# Altium PCB Grabber_DIOT.PCBDOC (part 1 of 7)
Units mm, origin at the board's own origin, x right, y up, seen from the top; angles counter-clockwise.
Board outline 222.9 x 100 mm, 4 copper layers (L1, P2, P3, L4), stack 1.6 mm thick; 235 components, 180 nets, 1032 pads, 664 vias.
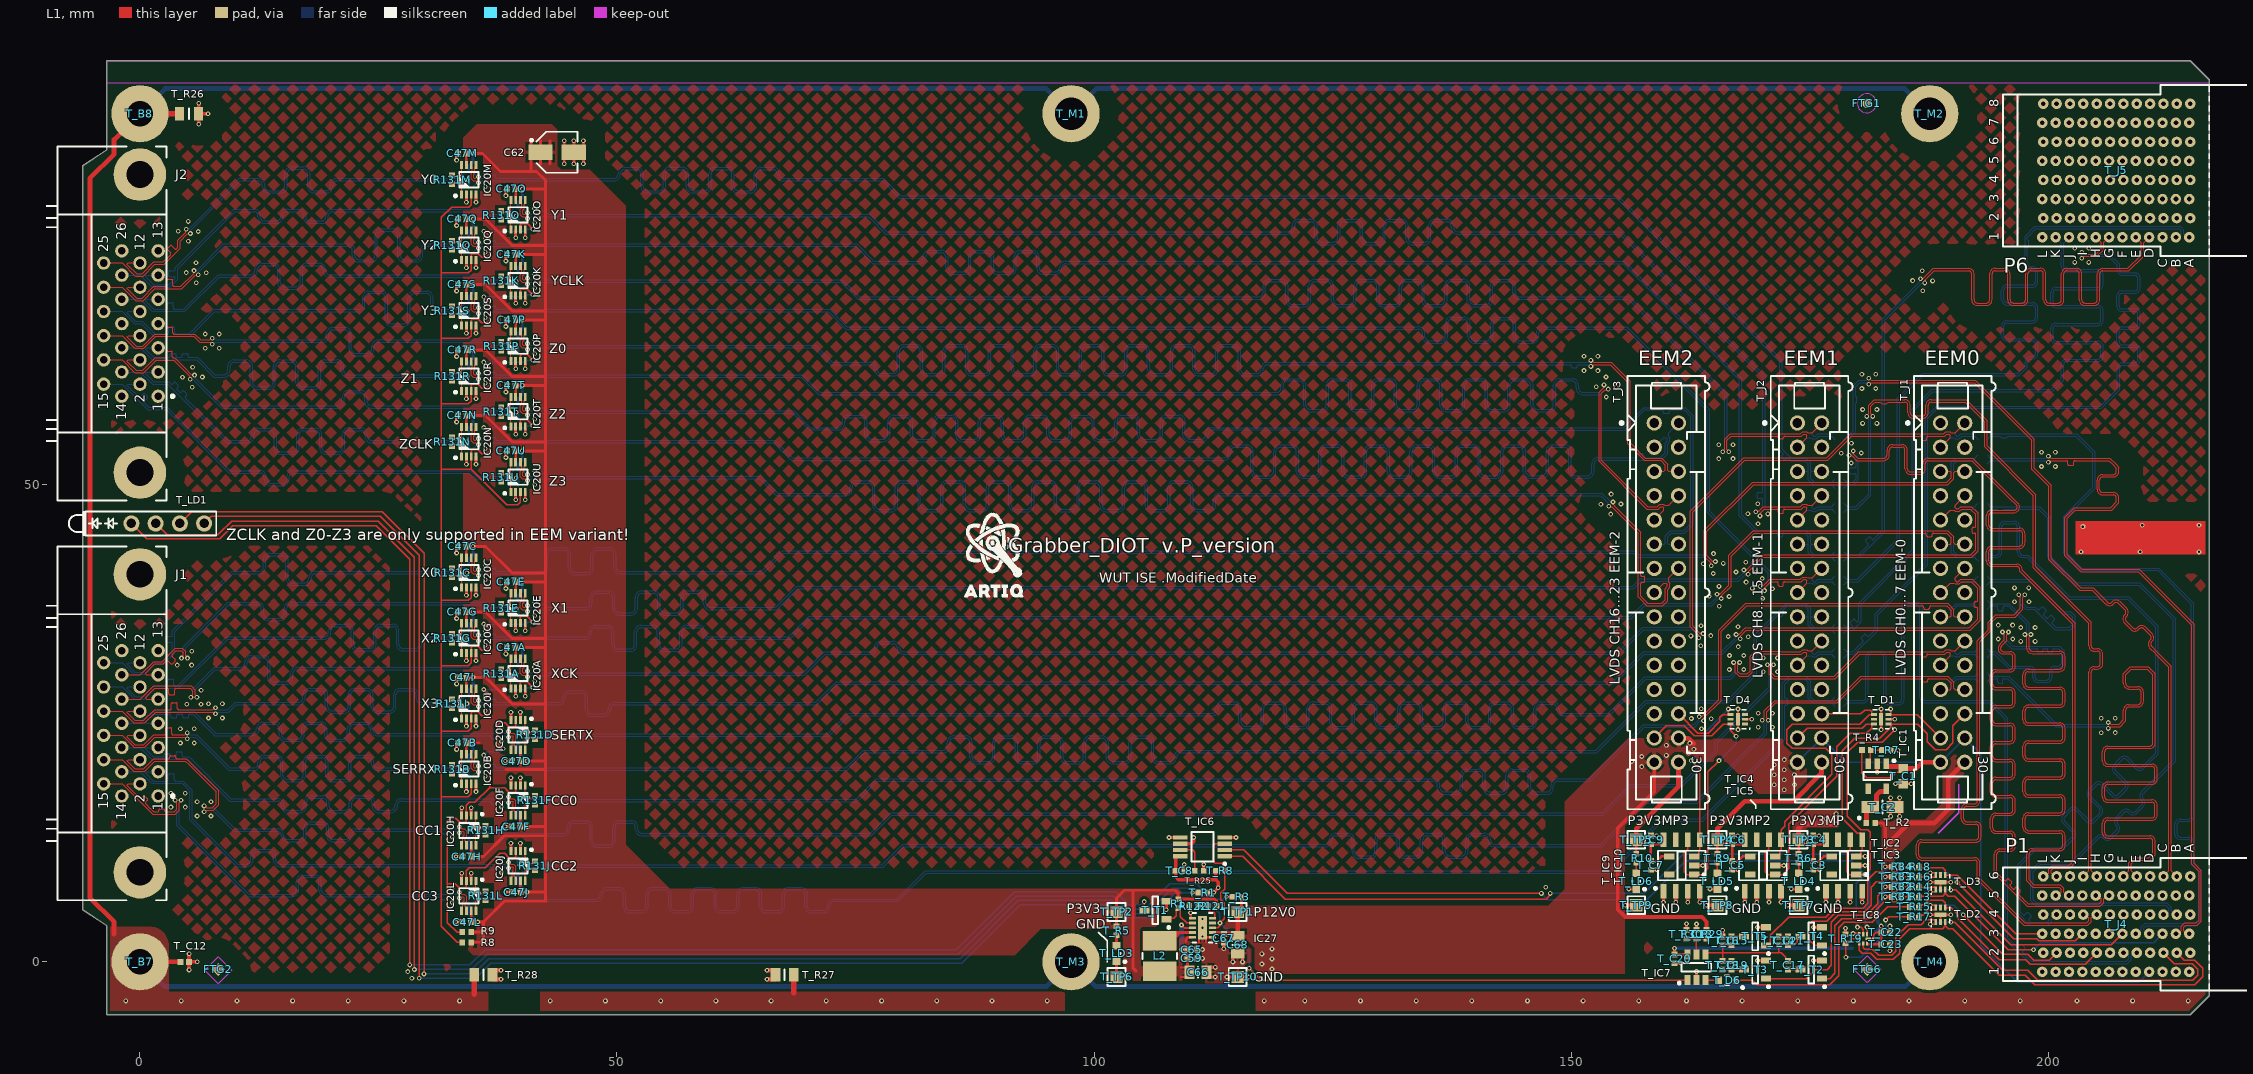
[diagram p0: L1 view]
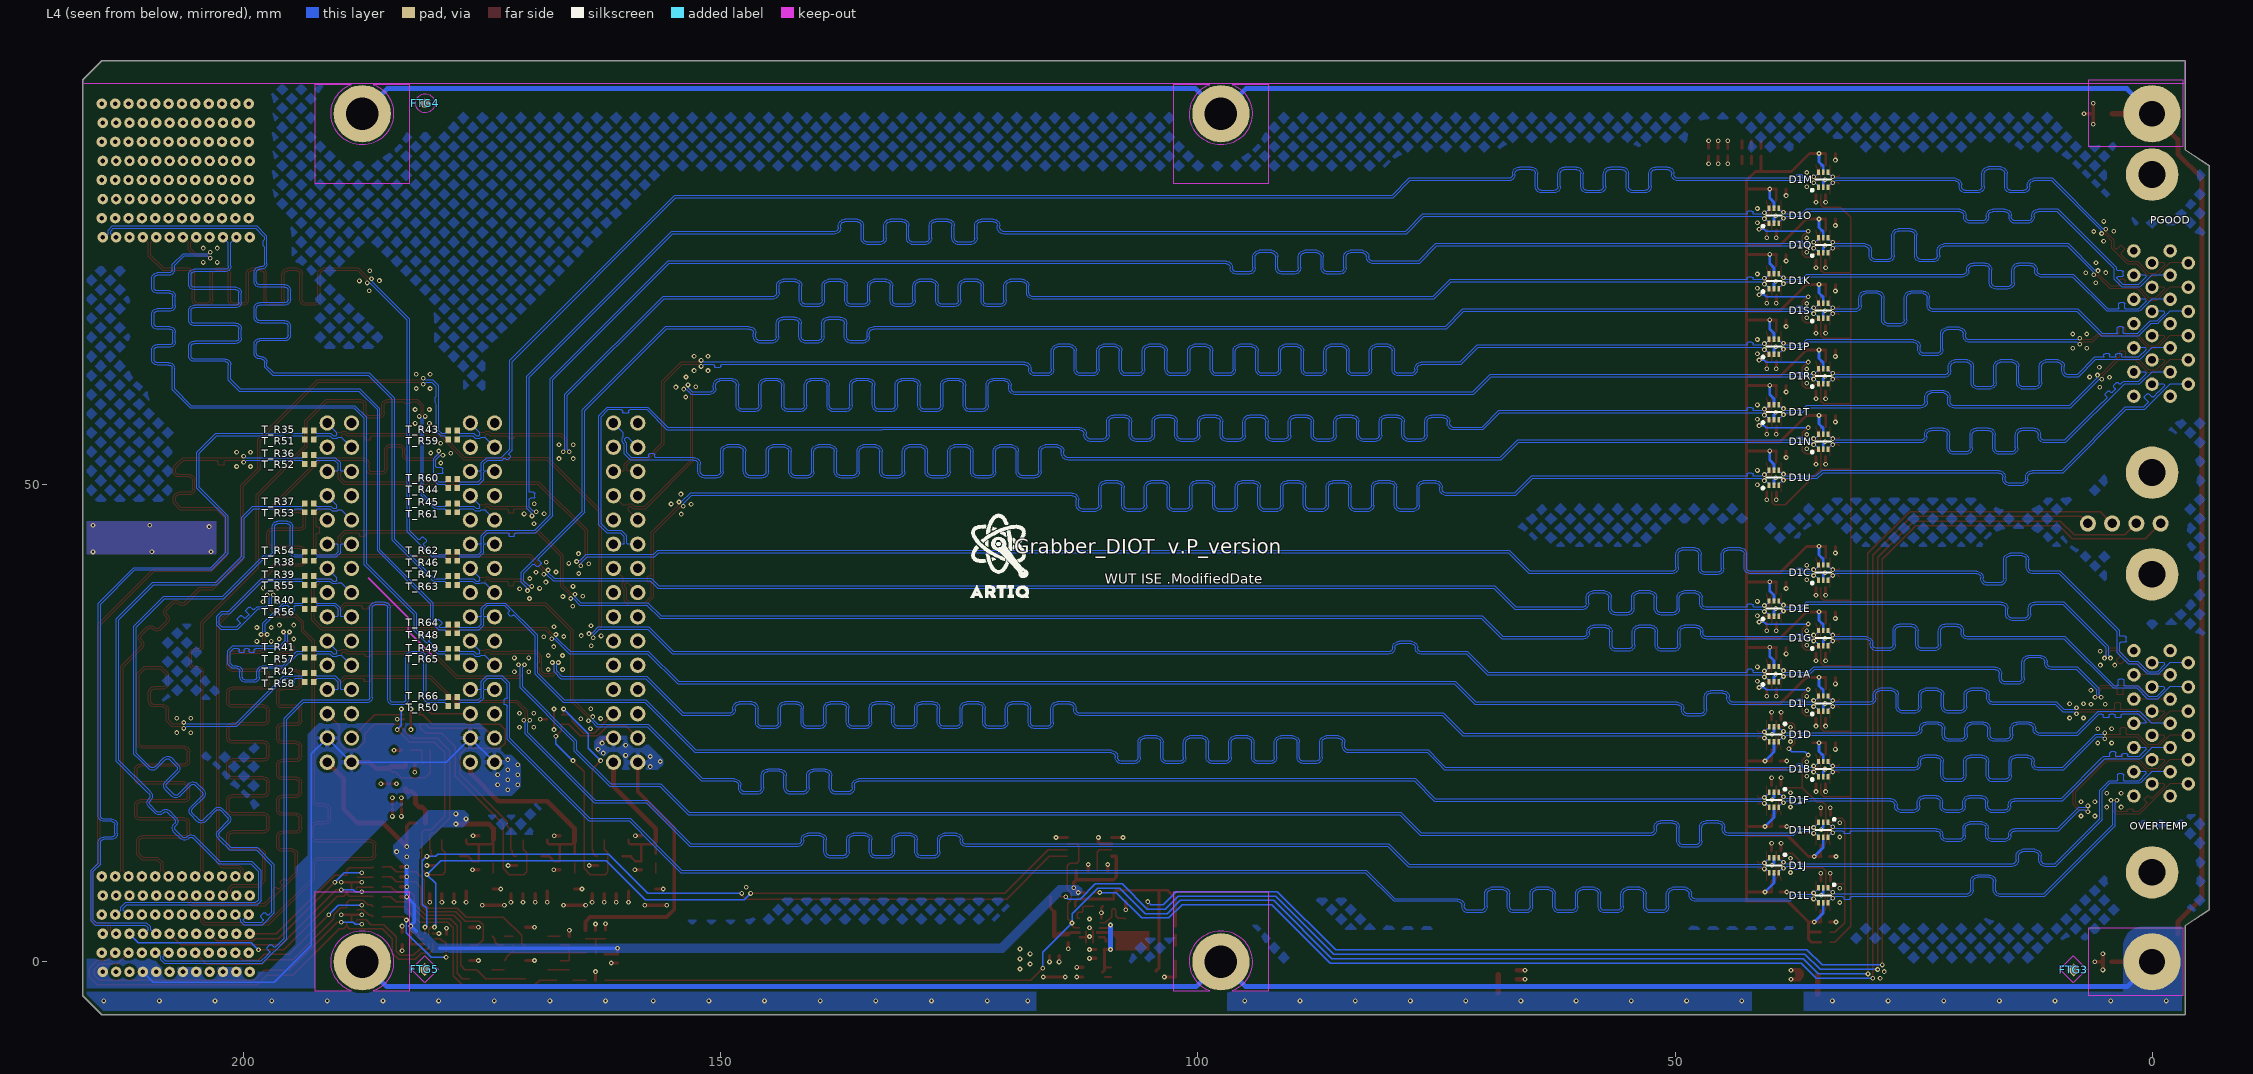
[diagram p1: L4 view, seen from below]
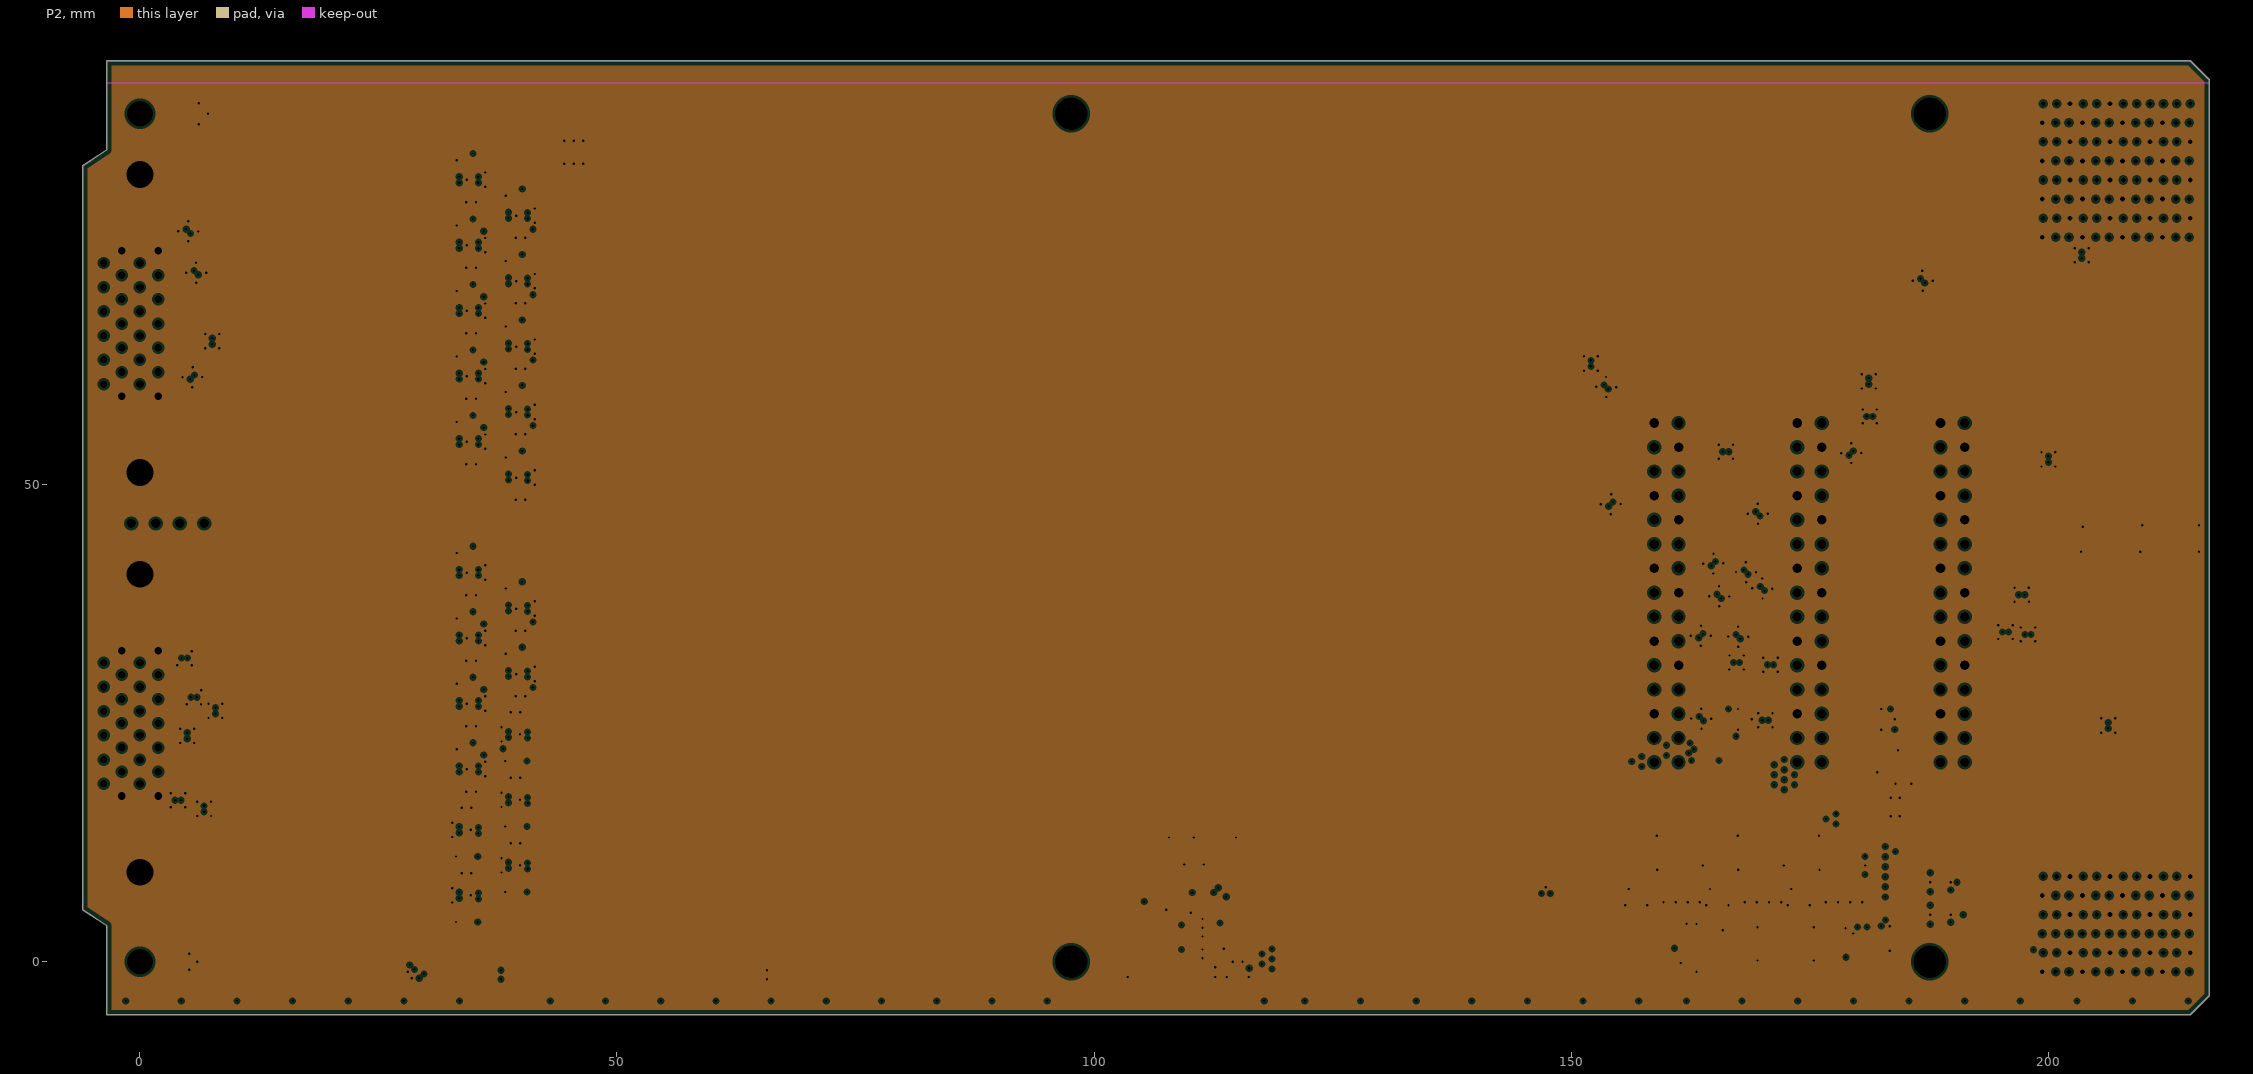
[diagram p2: P2, clearances drawn from the general rule]
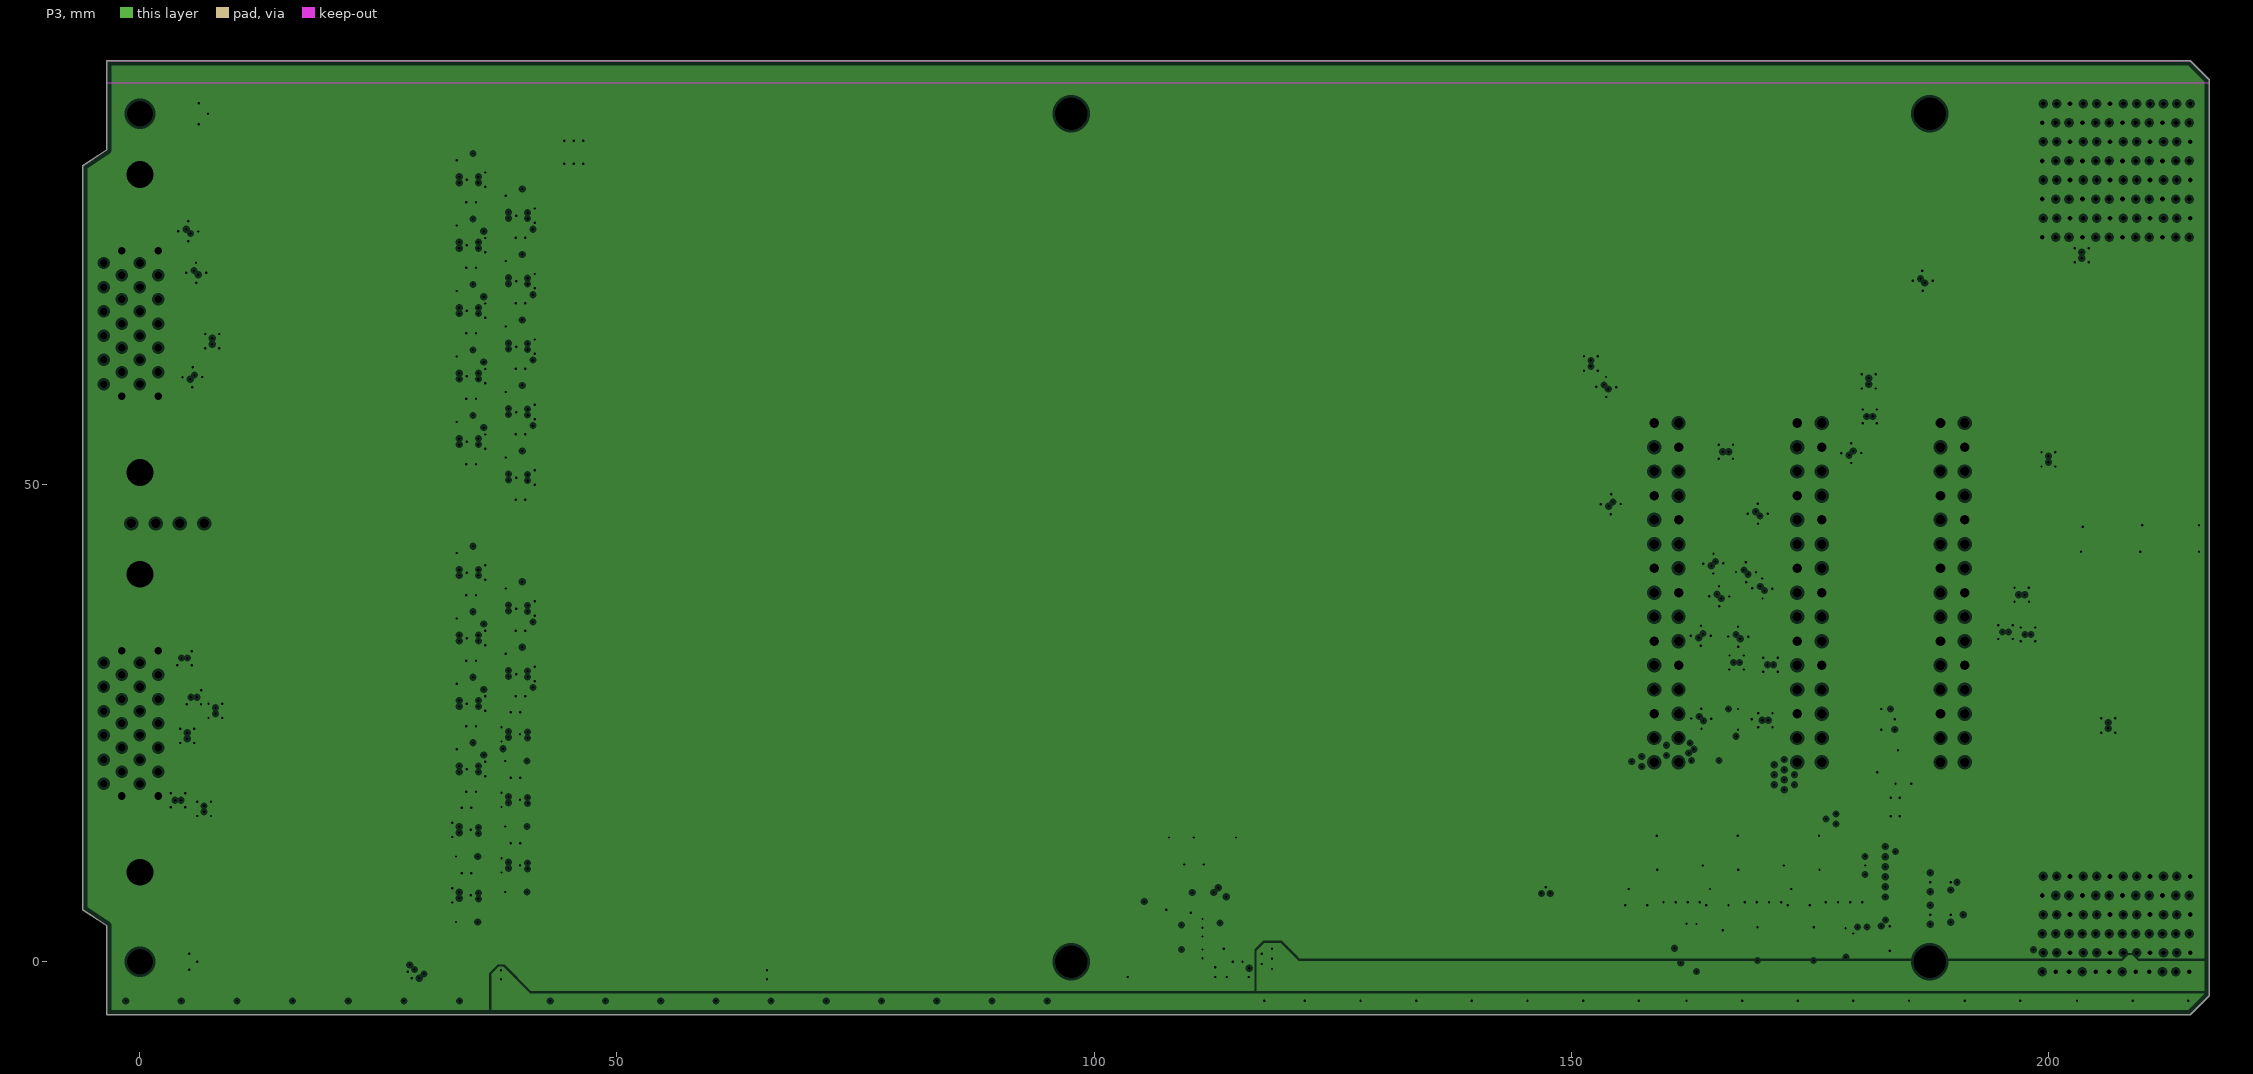
[diagram p3: P3, clearances drawn from the general rule]

## Layer stack, top to bottom
TopSolder: solder mask 0.0102, Solder Resist, Dk 3.5
L1: signal copper 0.045
Dielectric1: prepreg 0.12, FR-4, Dk 4.2
P2: plane copper 0.035, net GND
Dielectric 2: core 1.2, FR-4, Dk 4.2
P3: plane copper 0.035, net (Multiple Nets)
Dielectric 3: prepreg 0.12, FR-4, Dk 4.2
L4: signal copper 0.045
Bottom Solder: solder mask 0.0102, Solder Resist, Dk 3.5

## Board outline
-3.5,-5.55 -3.5,3.8 -6,5.45 -6,83.45 -3.5,85.1 -3.5,94.45 214.9,94.45 216.9,92.45 216.9,-3.55 214.9,-5.55

## Design rules (kind name [scope] priority, off if disabled: settings)
AcuteAngle [All] p1: minimum=4.50000000000000E+0001 checktracksonly=FALSE
AssemblyTestPointUsage [All] p1 off:
AssemblyTestpoint [All] p1 off: testpointundercomponent=TRUE minsize=1.016 maxsize=2.54 preferedsize=1.524 minholesize=0 maxholesize=1.016 preferedholesize=0.813 testpointgrid=0.025 usegrid=TRUE gridtolerance=0 allowsidetop=TRUE allowsidebottom=TRUE
BoardOutlineClearance [not ( (HasFootprint('AMPHENOL_10052838-101LF') or   HasFootprint('AMPHENOL_10052825-101LF') or    HasFootprint('3M_3341-31') or   HasFootprint('3M_N10226-5212PC') or  HasFootprint('LED_AVAGO_HSMC-C110') or  HasFootprint('LED_AVAGO_HSME-C110') or HasFootprint('LED_DIALIGHT_571-0112F') )   and (OnTopSilkscreen or OnBottomSilkscreen)  )] p1: gap=0.4 ignorepadtopadclearanceinfootprint=FALSE
Clearance Clearance_Balancing_To_Mechanicals [InPadClass('Mechanical') and (not PadIsPlated) vs InPolygonClass('PolyClass_Balancing')] p1: gap=0.7 ignorepadtopadclearanceinfootprint=FALSE // Clearance constraint used by the balancing polygon generator - between polygon and Mechanical pad class.
Clearance Clearance_Balancing_To_HV [InNetClass('HV') vs InPolygonClass('PolyClass_Balancing')] p2: gap=3 ignorepadtopadclearanceinfootprint=FALSE // Clearance constraint used by the balancing polygon generator - between polygon and HV Class.
Clearance Clearance_Balancing_To_DiffPair [InAnyDifferentialPair vs InPolygonClass('PolyClass_Balancing')] p3: gap=2.5 ignorepadtopadclearanceinfootprint=FALSE // Clearance constraint used by the balancing polygon generator - between polygon and Diff pairs.
Clearance Clearance_Balancing_To_Keepout [((not OnCopper) and isKeepout) vs InPolygonClass('PolyClass_Balancing')] p4: gap=0.127 ignorepadtopadclearanceinfootprint=FALSE // Clearance constraint used by the balancing polygon generator - between polygon and Keepout layer.
Clearance Clearance_Balancing_To_Poly [InPolygon vs InPolygonClass('PolyClass_Balancing')] p5: gap=2 ignorepadtopadclearanceinfootprint=FALSE // Clearance constraint used by the balancing polygon generator - between polygon and polygons.
Clearance Clearance_Balancing_To_Rest [not ((not OnCopper) and isKeepout) vs InPolygonClass('PolyClass_Balancing')] p6: gap=2 ignorepadtopadclearanceinfootprint=FALSE // Clearance constraint used by the balancing polygon generator - between polygon and everything else.
Clearance Clearance_Via_100Z__to__poly_1 [IsVia and (InDifferentialPairClass('Diff_100Ohm') or InNetClass('CL_LVDS') or InNetClass('BP_IO.LVDS_N[0..15]') or InNetClass('BP_IO.LVDS_P[0..15]') or InNetClass('EEM_IO.LVDS_N[0..20]') or InNetClass('EEM_IO.LVDS_P[0..20]')) vs InPoly            and InNet('GND')] p7: gap=0.35 ignorepadtopadclearanceinfootprint=FALSE
Clearance Clearance_Poly_Z [InDifferentialPairClass('Diff_100Ohm')  or InNetClass('50Ohm') vs InPolygon] p8: gap=0.6 ignorepadtopadclearanceinfootprint=FALSE
Clearance Clearance_Poly [InPoly] p9: gap=0.3 ignorepadtopadclearanceinfootprint=FALSE
Clearance Clearance_outer [OnTopLayer or OnBottomLayer] p10: gap=0.125 ignorepadtopadclearanceinfootprint=TRUE
Clearance Clearance_inner [not ( OnTopLayer or OnBottomLayer )] p11: gap=0.125 ignorepadtopadclearanceinfootprint=FALSE
ComponentClearance ComponentClearance_EEPROM_alternate [HasParameterValue('Manufacturer Part Number', '24AA025E48-I/SN') vs HasParameterValue('Manufacturer Part Number', '24AA02E48T-I/OT')] p1: gap=-1 collisioncheckmode=3 verticalgap=-1 showdistances=FALSE
ComponentClearance ComponentClearance_Screws_FP [HasFootprint('3M_3341-31')] p2: gap=0 collisioncheckmode=3 verticalgap=-1 showdistances=FALSE
ComponentClearance ComponentClearance_FP_to_Connectors [InNamedUnion('Union_FP') vs HasFootprint('3M_N10226-5212PC')] p3: gap=-1 collisioncheckmode=3 verticalgap=-1 showdistances=FALSE
ComponentClearance ComponentClearance_FP_to_MH [InNamedUnion('Union_FP') vs HasFootprint('PTH_3.4X6_BTKO')] p4: gap=-1 collisioncheckmode=3 verticalgap=-1 showdistances=FALSE
ComponentClearance ComponentClearance_FP_to_LEDs [InNamedUnion('Union_FP') vs HasFootprint('LED_AVAGO_HSMC-C110') or  HasFootprint('LED_AVAGO_HSME-C110') or HasFootprint('LED_DIALIGHT_571-0112F')] p5: gap=-1 collisioncheckmode=3 verticalgap=-1 showdistances=FALSE
ComponentClearance ComponentClearance_Case_to_Connectors [InNamedUnion('Union_Case') vs HasFootprint('3M_N10226-5212PC')] p6: gap=-1 collisioncheckmode=3 verticalgap=-1 showdistances=FALSE
ComponentClearance ComponentClearance_Case [InNamedUnion('Union_Case')] p7: gap=0 collisioncheckmode=3 verticalgap=-1 showdistances=FALSE
ComponentClearance [All] p8: gap=0.254 collisioncheckmode=3 verticalgap=0.254 showdistances=FALSE donotcheckwithout3dbody=TRUE
DiffPairsRouting DiffPairsRouting_100_Ohm [InDifferentialPairClass('All Differential Pairs')] p1: maxlimit=0.127 minlimit=0.127 mostfreqgap=0.127 toplayer_minwidth=0.127 toplayer_maxwidth=0.127 toplayer_prefwidth=0.127 bottomlayer_minwidth=0.127 bottomlayer_maxwidth=0.127 bottomlayer_prefwidth=0.127 impedanceprofiledriven=TRUE impedanceprofileid={2A58BE3F-5391-4273-823F-6D82B2D4ED3D} impedanceprofilevalue=100.000000 maxuncoupledlength=14.732
FabricationTestPointUsage TestPointUsage [All] p1: valid=0 allowmultiple=FALSE
FabricationTestpoint Testpoint [All] p1: side=3 testpointundercomponent=TRUE minsize=1.016 maxsize=2.54 preferedsize=1.524 minholesize=0.508 maxholesize=1.016 preferedholesize=0.813 testpointgrid=0.025 allowsidetop=TRUE allowsidebottom=TRUE usegrid=TRUE gridtolerance=0
Height Height_Bottom [OnLayer('BottomLayer')] p1: minheight=0 maxheight=1.6 prefheight=1
Height Height_Top [All] p2: minheight=0 maxheight=25.4 prefheight=12.7
HoleSize [All] p1: absolutevalues=TRUE maxlimit=3.5 minlimit=0.15 maxpercent=80.000 minpercent=20.000
HoleToHoleClearance [All] p1: gap=0.15 allowstackedmicrovias=TRUE
MatchedLengths MatchedLengths_xSignals_CL__Group [InxSignalClass('CL_LVDS')] p1: tolerance=25.4 checknetsindiffpair=FALSE checkdiffpairvsdiffpair=TRUE checkxsignals=TRUE checkothers=TRUE usedelayunits=TRUE delaytolerance=10.000000
MatchedLengths MatchedLengths_xSignals_BP__Group [InxSignalClass('BP_LVDS')] p2: tolerance=25.4 checknetsindiffpair=FALSE checkdiffpairvsdiffpair=TRUE checkxsignals=TRUE checkothers=TRUE usedelayunits=TRUE delaytolerance=10.000000
MatchedLengths MatchedLengths_xSignals_EEM__Group [InxSignalClass('EEM_LVDS')] p3: tolerance=25.4 checknetsindiffpair=FALSE checkdiffpairvsdiffpair=TRUE checkxsignals=TRUE checkothers=TRUE usedelayunits=TRUE delaytolerance=10.000000
MatchedLengths MatchedLengths_xSignals_CL__Pair [InxSignalClass('CL_LVDS')] p4: tolerance=25.4 checknetsindiffpair=TRUE checkdiffpairvsdiffpair=FALSE checkxsignals=FALSE checkothers=FALSE usedelayunits=TRUE delaytolerance=5.000000
MatchedLengths MatchedLengths_xSignals_BP__Pair [InxSignalClass('BP_LVDS')] p5: tolerance=25.4 checknetsindiffpair=TRUE checkdiffpairvsdiffpair=FALSE checkxsignals=FALSE checkothers=FALSE usedelayunits=TRUE delaytolerance=5.000000
MatchedLengths MatchedLengths_xSignals_EEM__Pair [InxSignalClass('EEM_LVDS')] p6: tolerance=25.4 checknetsindiffpair=TRUE checkdiffpairvsdiffpair=FALSE checkxsignals=FALSE checkothers=FALSE usedelayunits=TRUE delaytolerance=5.000000
MinimumSolderMaskSliver MinimumSolderMaskSliver_FXMA2102UMX [HasFootprint('FXMA2102UMX')] p1: minsoldermaskwidth=0.025
MinimumSolderMaskSliver [All] p2: minsoldermaskwidth=0.1
ParallelSegment [All] p1: limit=5 gap=0.254
PlaneClearance PlaneClearance_100Z [(InDifferentialPairClass('Diff_100Ohm') or InNetClass('CL_LVDS') or InNetClass('BP_IO.LVDS_N[0..15]') or InNetClass('BP_IO.LVDS_P[0..15]') or InNetClass('EEM_IO.LVDS_N[0..20]') or InNetClass('EEM_IO.LVDS_P[0..20]'))] p1: clearance=0.475
PlaneClearance [All] p2: clearance=0.254
PlaneConnect PlaneConnect_PressFit [HasCompParameterValue('PressFit', 'Yes')] p1: planeconnectstyle=Direct reliefexpansion=0.2 reliefentries=4 reliefconductorwidth=0.254 reliefairgap=0.254
PlaneConnect [All] p2: pad.planeconnectstyle=Relief pad.reliefexpansion=0.2 pad.reliefentries=4 pad.reliefconductorwidth=0.254 pad.reliefairgap=0.254 via.planeconnectstyle=Direct via.reliefexpansion=0.2 via.reliefentries=4 via.reliefconductorwidth=0.254 via.reliefairgap=0.15
PolygonConnect PolygonConnect_Pressfit [HasFootprint('AMPHENOL_10052825-101LF')] p1: thpad.connectstyle=Direct thpad.reliefconductorwidth=0.254 thpad.reliefentries=4 thpad.polygonreliefangle="90 Angle" thpad.airgapwidth=0.254 smdpad.connectstyle=Relief smdpad.reliefconductorwidth=0.254 smdpad.reliefentries=4 smdpad.polygonreliefangle="90 Angle" smdpad.airgapwidth=0.254 via.connectstyle=Relief via.reliefconductorwidth=0.254 via.reliefentries=4 via.polygonreliefangle="90 Angle" via.airgapwidth=0.254
PolygonConnect PolygonConnect_PWR_L2 [InNetClass('PWR') and InComponent('L2')] p2: thpad.connectstyle=Relief thpad.reliefconductorwidth=0.5 thpad.reliefentries=4 thpad.polygonreliefangle="90 Angle" thpad.airgapwidth=0.254 smdpad.connectstyle=Relief smdpad.reliefconductorwidth=1 smdpad.reliefentries=4 smdpad.polygonreliefangle="90 Angle" smdpad.airgapwidth=0.25 via.connectstyle=Direct via.reliefconductorwidth=0.254 via.reliefentries=2 via.polygonreliefangle="90 Angle" via.airgapwidth=0.254
PolygonConnect PolygonConnect_PWR [InNetClass('PWR')] p3: thpad.connectstyle=Relief thpad.reliefconductorwidth=0.5 thpad.reliefentries=4 thpad.polygonreliefangle="90 Angle" thpad.airgapwidth=0.254 smdpad.connectstyle=Relief smdpad.reliefconductorwidth=0.4 smdpad.reliefentries=4 smdpad.polygonreliefangle="90 Angle" smdpad.airgapwidth=0.25 via.connectstyle=Direct via.reliefconductorwidth=0.254 via.reliefentries=2 via.polygonreliefangle="90 Angle" via.airgapwidth=0.254
PolygonConnect [All] p4: thpad.connectstyle=Relief thpad.reliefconductorwidth=0.254 thpad.reliefentries=4 thpad.polygonreliefangle="90 Angle" thpad.airgapwidth=0.254 smdpad.connectstyle=Relief smdpad.reliefconductorwidth=0.254 smdpad.reliefentries=4 smdpad.polygonreliefangle="90 Angle" smdpad.airgapwidth=0.254 via.connectstyle=Direct via.reliefconductorwidth=0.254 via.reliefentries=4 via.polygonreliefangle="90 Angle" via.airgapwidth=0.254
RoomDefinition Overlapping [InComponentClass('Overlapping')] p1: confinementstyle=ConfineIn formatcopy=TRUE lockcomponents=FALSE outline 193.446,-9.737 193.446,12.616 229.679,12.616 229.679,-9.737
RoomDefinition U_PWR_Supply [InComponentClass('U_PWR_Supply')] p2: confinementstyle=ConfineIn formatcopy=TRUE lockcomponents=FALSE outline -7.864,-2.909 185.938,-2.909 185.938,87.896 -7.864,87.896
RoutingLayers RoutingLayers_Diff [InAnyDifferentialPair] p1: top layer_v5=TRUE bottom layer_v5=TRUE
RoutingLayers [All] p2: top layer_v5=TRUE bottom layer_v5=TRUE
RoutingVias RoutingVias_100Z [(InDifferentialPairClass('Diff_100Ohm') or InNetClass('CL_LVDS') or InNetClass('BP_IO.LVDS_N[0..15]') or InNetClass('BP_IO.LVDS_P[0..15]') or InNetClass('EEM_IO.LVDS_N[0..20]') or InNetClass('EEM_IO.LVDS_P[0..20]'))] p1: holewidth=0.25 width=0.5 viastyle="Through Hole" minholewidth=0.25 minwidth=0.5 maxholewidth=0.25 maxwidth=0.5
RoutingVias [All] p2: holewidth=0.25 width=0.5 viastyle="Through Hole" minholewidth=0.25 minwidth=0.5 maxholewidth=0.508 maxwidth=1.016
SMDEntry [All] p1 off: side=TRUE corner=TRUE anyangle=FALSE
SilkToSilkClearance [All] p1: silktosilkclearance=0.15
SilkToSolderMaskClearance SilkscreenOverComponentPads [IsPad] p1: minsilkscreentomaskgap=0.025 clearancetoexposedcopper=FALSE
SolderMaskExpansion SolderMaskExpansion_1 [IsVia] p1: expansion=0.05 istentingtop=TRUE
SolderMaskExpansion [All] p2: expansion=0.05 istentingtop=FALSE
StubLength [All] p1: limit=3
SupplyNets "Schematic Supply Nets_6" [InNet('P12V0')] p1: voltage=0.000
SupplyNets "Schematic Supply Nets_5" [InNet('P3V3_MP3')] p2: voltage=0.000
SupplyNets "Schematic Supply Nets_4" [InNet('STRIP1')] p3: voltage=0.000
SupplyNets "Schematic Supply Nets_3" [InNet('P3V3_MP2')] p4: voltage=0.000
SupplyNets "Schematic Supply Nets_2" [InNet('GND')] p5: voltage=0.000
SupplyNets "Schematic Supply Nets_1" [InNet('P3V3')] p6: voltage=0.000
SupplyNets "Schematic Supply Nets" [InNet('P3V3_MP')] p7: voltage=0.000
UnConnectedPin [All] p1 off:
UnRoutedNet [not InPolygonClass('PolyClass_Balancing')] p1: checkbadconnections=TRUE
ViasUnderSMD [All] p1: allowed=TRUE
Width Width_pwr [InNetClass('PWR')] p1: maxlimit=2 minlimit=0.152 preferedwidth=0.3 minimp=50.000000 maximp=50.000000 favimp=50.000000
Width [All] p2: maxlimit=2 minlimit=0.152 preferedwidth=0.152 minimp=50.000000 maximp=50.000000 favimp=50.000000
14 further rules are at their usual default settings.

## Classes and differential pairs
polygon class PolyClass_Balancing: Balancing_L1 Balancing_L4
component class U_LVDS_repeater16: C47Q D1Q IC20Q R131Q
component class U_LVDS_repeater14: C47O D1O IC20O R131O
component class U_LVDS_repeater10: C47K D1K IC20K R131K
component class U_LVDS_repeater9: C47J D1J IC20J R131J
component class U_LVDS_repeater4: C47E D1E IC20E R131E
component class U_Temp_monitoring: T_C8 T_IC6 T_R25
component class U_Power-up_delay: T_C13 T_C14 T_C15 T_C16 T_C17 T_C18 T_C19 T_C20 T_C21 T_D6 T_IC7 T_R29 T_R30 T_R31 T_R32 T_R33 T_R34 T_T2 T_T3 T_T4 T_T5
component class U_FP_Connectors: J1 J2 SCREW1 SCREW2 SCREW3 SCREW4
component class Overlapping: T_J4
component class Grabber_DIOT: R8 R9
component class EEM_Connectors: T_C3 T_C4 T_C5 T_C6 T_C7 T_C9 T_D1 T_D4 T_IC2 T_IC3 T_IC4 T_IC5 T_IC9 T_IC10 T_J1 T_J2 T_J3
differential pair class MGT: BP_MGT_Rx BP_MGT_Tx
net class GA[0..3]: GA0 GA1 GA2 GA3
component class U_PWR_Supply: C59 C62 C65 C66 C67 C68 IC27 L2 R1 R121 R122 T_C1 T_C2 T_IC1 T_LD1 T_LD3 T_LD4 T_LD5 T_LD6 T_R1 T_R2 T_R3 T_R4 T_R5 T_R6 T_R7 T_R8 T_R9 T_R10 T_T1 T_TP1 T_TP2 T_TP3 T_TP4 T_TP5 T_TP6 T_TP7 T_TP8 T_TP9 T_TP10
net class ESD_STRIP: STRIP1 STRIP2 STRIP3
differential pair class Diff_100Ohm: BP_CLK.CLK EEM_IO.LVDS0 EEM_IO.LVDS1 EEM_IO.LVDS2 EEM_IO.LVDS3 EEM_IO.LVDS4 EEM_IO.LVDS5 EEM_IO.LVDS6 EEM_IO.LVDS7 EEM_IO.LVDS8 EEM_IO.LVDS9 EEM_IO.LVDS10 EEM_IO.LVDS11 EEM_IO.LVDS12 EEM_IO.LVDS13 EEM_IO.LVDS14 EEM_IO.LVDS15 EEM_IO.LVDS16 EEM_IO.LVDS17 EEM_IO.LVDS18 EEM_IO.LVDS19 EEM_IO.LVDS20 PE_CLK
net class PWR: NetIC27_9 NetT_C2_1 P3V3 P3V3_MP P12V0
net class EEM_IO.LVDS_P[0..20]: EEM_IO.LVDS_P0 EEM_IO.LVDS_P1 EEM_IO.LVDS_P2 EEM_IO.LVDS_P3 EEM_IO.LVDS_P4 EEM_IO.LVDS_P5 EEM_IO.LVDS_P6 EEM_IO.LVDS_P7 EEM_IO.LVDS_P8 EEM_IO.LVDS_P9 EEM_IO.LVDS_P10 EEM_IO.LVDS_P11 EEM_IO.LVDS_P12 EEM_IO.LVDS_P13 EEM_IO.LVDS_P14 EEM_IO.LVDS_P15 EEM_IO.LVDS_P16 EEM_IO.LVDS_P17 EEM_IO.LVDS_P18 EEM_IO.LVDS_P19 EEM_IO.LVDS_P20
net class EEM_IO.LVDS_N[0..20]: EEM_IO.LVDS_N0 EEM_IO.LVDS_N1 EEM_IO.LVDS_N2 EEM_IO.LVDS_N3 EEM_IO.LVDS_N4 EEM_IO.LVDS_N5 EEM_IO.LVDS_N6 EEM_IO.LVDS_N7 EEM_IO.LVDS_N8 EEM_IO.LVDS_N9 EEM_IO.LVDS_N10 EEM_IO.LVDS_N11 EEM_IO.LVDS_N12 EEM_IO.LVDS_N13 EEM_IO.LVDS_N14 EEM_IO.LVDS_N15 EEM_IO.LVDS_N16 EEM_IO.LVDS_N17 EEM_IO.LVDS_N18 EEM_IO.LVDS_N19 EEM_IO.LVDS_N20
net class BP_IO.LVDS_P[0..15]: BP_IO.LVDS_P0 BP_IO.LVDS_P1 BP_IO.LVDS_P2 BP_IO.LVDS_P3 BP_IO.LVDS_P4 BP_IO.LVDS_P5 BP_IO.LVDS_P6 BP_IO.LVDS_P7 BP_IO.LVDS_P8 BP_IO.LVDS_P9 BP_IO.LVDS_P10 BP_IO.LVDS_P11 BP_IO.LVDS_P12 BP_IO.LVDS_P13 BP_IO.LVDS_P14 BP_IO.LVDS_P15
net class BP_IO.LVDS_N[0..15]: BP_IO.LVDS_N0 BP_IO.LVDS_N1 BP_IO.LVDS_N2 BP_IO.LVDS_N3 BP_IO.LVDS_N4 BP_IO.LVDS_N5 BP_IO.LVDS_N6 BP_IO.LVDS_N7 BP_IO.LVDS_N8 BP_IO.LVDS_N9 BP_IO.LVDS_N10 BP_IO.LVDS_N11 BP_IO.LVDS_N12 BP_IO.LVDS_N13 BP_IO.LVDS_N14 BP_IO.LVDS_N15
component class U_DIOT_signal_routing: T_C22 T_C23 T_IC8 T_R35 T_R36 T_R37 T_R38 T_R39 T_R40 T_R41 T_R42 T_R43 T_R44 T_R45 T_R46 T_R47 T_R48 T_R49 T_R50 T_R51 T_R52 T_R53 T_R54 T_R55 T_R56 T_R57 T_R58 T_R59 T_R60 T_R61 T_R62 T_R63 T_R64 T_R65 T_R66
component class CPCIS_Connectors_P1_P6: P1 T_D2 T_D3 T_J4 T_J5 T_R13 T_R14 T_R15 T_R16 T_R17 T_R18 T_R19
net class CL_LVDS: CC0_N CC0_P CC1_N CC1_P CC2_N CC2_P CC3_N CC3_P SERRX_N SERRX_P SERTX_N SERTX_P X0_N X0_P X1_N X1_P X2_N X2_P X3_N X3_P XCLK_N XCLK_P Y0_N Y0_P Y1_N Y1_P Y2_N Y2_P Y3_N Y3_P YCLK_N YCLK_P Z0_N Z0_P Z1_N Z1_P Z2_N Z2_P Z3_N Z3_P ZCLK_N ZCLK_P
component class U_LVDS_repeater2: C47C D1C IC20C R131C
component class U_LVDS_repeater0: C47A D1A IC20A R131A
component class U_LVDS_repeater19: C47T D1T IC20T R131T
component class U_LVDS_repeater18: C47S D1S IC20S R131S
component class U_LVDS_repeater8: C47I D1I IC20I R131I
channel class LVDS_repeater: U_LVDS_repeater0 U_LVDS_repeater1 U_LVDS_repeater2 U_LVDS_repeater3 U_LVDS_repeater4 U_LVDS_repeater5 U_LVDS_repeater6 U_LVDS_repeater7 U_LVDS_repeater8 U_LVDS_repeater9 U_LVDS_repeater10 U_LVDS_repeater11 U_LVDS_repeater12 U_LVDS_repeater13 U_LVDS_repeater14 U_LVDS_repeater15 U_LVDS_repeater16 U_LVDS_repeater17 U_LVDS_repeater18 U_LVDS_repeater19 U_LVDS_repeater20
component class U_LVDS_repeater3: C46J C47D D1D IC19J IC20D R131D R132J R133J T25J
component class U_LVDS_repeater5: C46I C47F D1F IC19I IC20F R131F R132I R133I T25I
component class U_LVDS_repeater7: C46H C47H D1H IC19H IC20H R131H R132H R133H T25H
component class U_LVDS_repeater13: C46E C47N D1N IC19E IC20N R131N R132E R133E T25E
component class U_LVDS_repeater15: C46D C47P D1P IC19D IC20P R131P R132D R133D T25D
component class U_LVDS_repeater17: C47R D1R IC20R R131R
component class U_LVDS_repeater6: C47G D1G IC20G R131G
component class U_LVDS_repeater20: C47U D1U IC20U R131U
component class U_Mechanical: FTG1 FTG2 FTG3 FTG4 FTG5 FTG6 T_B7 T_B8 T_C12 T_M1 T_M2 T_M3 T_M4 T_R26 T_R27 T_R28
component class U_LVDS_repeater1: C47B D1B IC20B R131B
component class U_LVDS_repeater11: C47L D1L IC20L R131L
component class U_LVDS_repeater12: C47M D1M IC20M R131M
differential pair BP_CLK.CLK: +BP_CLK.CLK_P -BP_CLK.CLK_N
differential pair BP_MGT_Tx: +BP_MGT_Tx_P -BP_MGT_Tx_N
differential pair BP_MGT_Rx: +BP_MGT_Rx_P -BP_MGT_Rx_N
differential pair EEM_IO.LVDS20: +EEM_IO.LVDS_P20 -EEM_IO.LVDS_N20
differential pair EEM_IO.LVDS19: +EEM_IO.LVDS_P19 -EEM_IO.LVDS_N19
differential pair EEM_IO.LVDS18: +EEM_IO.LVDS_P18 -EEM_IO.LVDS_N18
differential pair EEM_IO.LVDS17: +EEM_IO.LVDS_P17 -EEM_IO.LVDS_N17
differential pair EEM_IO.LVDS16: +EEM_IO.LVDS_P16 -EEM_IO.LVDS_N16
differential pair EEM_IO.LVDS15: +EEM_IO.LVDS_P15 -EEM_IO.LVDS_N15
differential pair EEM_IO.LVDS14: +EEM_IO.LVDS_P14 -EEM_IO.LVDS_N14
differential pair EEM_IO.LVDS13: +EEM_IO.LVDS_P13 -EEM_IO.LVDS_N13
differential pair EEM_IO.LVDS12: +EEM_IO.LVDS_P12 -EEM_IO.LVDS_N12
differential pair EEM_IO.LVDS11: +EEM_IO.LVDS_P11 -EEM_IO.LVDS_N11
differential pair EEM_IO.LVDS10: +EEM_IO.LVDS_P10 -EEM_IO.LVDS_N10
differential pair EEM_IO.LVDS9: +EEM_IO.LVDS_P9 -EEM_IO.LVDS_N9
differential pair EEM_IO.LVDS8: +EEM_IO.LVDS_P8 -EEM_IO.LVDS_N8
differential pair EEM_IO.LVDS7: +EEM_IO.LVDS_P7 -EEM_IO.LVDS_N7
differential pair EEM_IO.LVDS6: +EEM_IO.LVDS_P6 -EEM_IO.LVDS_N6
differential pair EEM_IO.LVDS5: +EEM_IO.LVDS_P5 -EEM_IO.LVDS_N5
differential pair EEM_IO.LVDS4: +EEM_IO.LVDS_P4 -EEM_IO.LVDS_N4
differential pair EEM_IO.LVDS3: +EEM_IO.LVDS_P3 -EEM_IO.LVDS_N3
differential pair EEM_IO.LVDS2: +EEM_IO.LVDS_P2 -EEM_IO.LVDS_N2
differential pair EEM_IO.LVDS1: +EEM_IO.LVDS_P1 -EEM_IO.LVDS_N1
differential pair EEM_IO.LVDS0: +EEM_IO.LVDS_P0 -EEM_IO.LVDS_N0
differential pair BP_IO.LVDS15: +BP_IO.LVDS_P15 -BP_IO.LVDS_N15
differential pair BP_IO.LVDS14: +BP_IO.LVDS_P14 -BP_IO.LVDS_N14
differential pair BP_IO.LVDS13: +BP_IO.LVDS_P13 -BP_IO.LVDS_N13
differential pair BP_IO.LVDS12: +BP_IO.LVDS_P12 -BP_IO.LVDS_N12
differential pair BP_IO.LVDS11: +BP_IO.LVDS_P11 -BP_IO.LVDS_N11
differential pair BP_IO.LVDS10: +BP_IO.LVDS_P10 -BP_IO.LVDS_N10
differential pair BP_IO.LVDS9: +BP_IO.LVDS_P9 -BP_IO.LVDS_N9
differential pair BP_IO.LVDS8: +BP_IO.LVDS_P8 -BP_IO.LVDS_N8
differential pair BP_IO.LVDS7: +BP_IO.LVDS_P7 -BP_IO.LVDS_N7
differential pair BP_IO.LVDS6: +BP_IO.LVDS_P6 -BP_IO.LVDS_N6
differential pair BP_IO.LVDS5: +BP_IO.LVDS_P5 -BP_IO.LVDS_N5
differential pair BP_IO.LVDS4: +BP_IO.LVDS_P4 -BP_IO.LVDS_N4
differential pair BP_IO.LVDS3: +BP_IO.LVDS_P3 -BP_IO.LVDS_N3
differential pair BP_IO.LVDS2: +BP_IO.LVDS_P2 -BP_IO.LVDS_N2
differential pair BP_IO.LVDS1: +BP_IO.LVDS_P1 -BP_IO.LVDS_N1
differential pair BP_IO.LVDS0: +BP_IO.LVDS_P0 -BP_IO.LVDS_N0
differential pair ZCLK: +ZCLK_P -ZCLK_N
differential pair Z3: +Z3_P -Z3_N
differential pair Z2: +Z2_P -Z2_N
differential pair Z1: +Z1_P -Z1_N
differential pair Z0: +Z0_P -Z0_N
differential pair YCLK: +YCLK_P -YCLK_N
differential pair Y3: +Y3_P -Y3_N
differential pair Y2: +Y2_P -Y2_N
differential pair Y1: +Y1_P -Y1_N
differential pair Y0: +Y0_P -Y0_N
differential pair XCLK: +XCLK_P -XCLK_N
differential pair X3: +X3_P -X3_N
differential pair X2: +X2_P -X2_N
differential pair X1: +X1_P -X1_N
differential pair X0: +X0_P -X0_N
differential pair SERTX: +SERTX_P -SERTX_N
differential pair SERRX: +SERRX_P -SERRX_N
differential pair CC0: +CC0_P -CC0_N
differential pair CC1: +CC1_P -CC1_N
differential pair CC2: +CC2_P -CC2_N
differential pair CC3: +CC3_P -CC3_N

## Components (designator, comment, footprint, x,y, rotation, side; value= is the part's Value field where it differs from the comment)
C47A "100nF" CAPC1005X55N 38.93,32.964 r0 top (schematic designator C47)
C47B "100nF" CAPC1005X55N 33.768,22.957 r0 top (schematic designator C47)
C47C "100nF" CAPC1005X55N 33.768,43.548 r0 top (schematic designator C47)
C47D "100nF" CAPC1005X55N 39.428,21.044 r0 top (schematic designator C47)
C47E "100nF" CAPC1005X55N 38.93,39.828 r0 top (schematic designator C47)
C47F "100nF" CAPC1005X55N 39.428,14.181 r0 top (schematic designator C47)
C47G "100nF" CAPC1005X55N 33.768,36.684 r0 top (schematic designator C47)
C47H "100nF" CAPC1005X55N 34.265,11.037 r0 top (schematic designator C47)
C47I "100nF" CAPC1005X55N 33.768,29.82 r0 top (schematic designator C47)
C47J "100nF" CAPC1005X55N 39.428,7.317 r0 top (schematic designator C47)
C47K "100nF" CAPC1005X55N 38.93,74.147 r0 top (schematic designator C47)
C47L "100nF" CAPC1005X55N 34.265,4.173 r0 top (schematic designator C47)
C47M "100nF" CAPC1005X55N 33.768,84.731 r0 top (schematic designator C47)
C47N "100nF" CAPC1005X55N 33.768,57.276 r0 top (schematic designator C47)
C47O "100nF" CAPC1005X55N 38.93,81.011 r0 top (schematic designator C47)
C47P "100nF" CAPC1005X55N 38.934,67.283 r0 top (schematic designator C47)
C47Q "100nF" CAPC1005X55N 33.768,77.867 r0 top (schematic designator C47)
C47R "100nF" CAPC1005X55N 33.799,64.139 r0 top (schematic designator C47)
C47S "100nF" CAPC1005X55N 33.768,71.003 r0 top (schematic designator C47)
C47T "100nF" CAPC1005X55N 38.93,60.419 r0 top (schematic designator C47)
C47U "100nF" CAPC1005X55N 38.93,53.556 r0 top (schematic designator C47)
C59 "100nF" CAPC1005X55N 110.267,0.361 r180 top
C62 "10uF" CAPAE430X540N 43.725,84.856 r0 top locked
C65 "100nF" CAPC1005X55N 110.267,1.287 r180 top
C66 "22uF" CAPC2012X135N 110.908,-1.088 r180 top
C67 "100nF" CAPC1005X55N 113.608,2.463 r90 top
C68 "22uF" CAPC2012X135N 115.062,1.781 r90 top
D1A "NUP4114UPXV6T1G" SOTFL50P160X60-6N 39.63,30.167 r90 bottom (schematic designator D1)
D1B "NUP4114UPXV6T1G" SOTFL50P160X60-6N 34.468,20.21 r90 bottom (schematic designator D1)
D1C "NUP4114UPXV6T1G" SOTFL50P160X60-6N 34.468,40.801 r90 bottom (schematic designator D1)
D1D "NUP4114UPXV6T1G" SOTFL50P160X60-6N 39.628,23.841 r270 bottom (schematic designator D1)
D1E "NUP4114UPXV6T1G" SOTFL50P160X60-6N 39.63,37.031 r90 bottom (schematic designator D1)
D1F "NUP4114UPXV6T1G" SOTFL50P160X60-6N 39.628,16.977 r270 bottom (schematic designator D1)
D1G "NUP4114UPXV6T1G" SOTFL50P160X60-6N 34.468,33.937 r90 bottom (schematic designator D1)
D1H "NUP4114UPXV6T1G" SOTFL50P160X60-6N 34.465,13.834 r270 bottom (schematic designator D1)
D1I "NUP4114UPXV6T1G" SOTFL50P160X60-6N 34.468,27.074 r90 bottom (schematic designator D1)
D1J "NUP4114UPXV6T1G" SOTFL50P160X60-6N 39.628,10.114 r270 bottom (schematic designator D1)
D1K "NUP4114UPXV6T1G" SOTFL50P160X60-6N 39.63,71.35 r90 bottom (schematic designator D1)
D1L "NUP4114UPXV6T1G" SOTFL50P160X60-6N 34.465,6.97 r270 bottom (schematic designator D1)
D1M "NUP4114UPXV6T1G" SOTFL50P160X60-6N 34.468,81.984 r90 bottom (schematic designator D1)
D1N "NUP4114UPXV6T1G" SOTFL50P160X60-6N 34.468,54.529 r90 bottom (schematic designator D1)
D1O "NUP4114UPXV6T1G" SOTFL50P160X60-6N 39.63,78.214 r90 bottom (schematic designator D1)
D1P "NUP4114UPXV6T1G" SOTFL50P160X60-6N 39.63,64.486 r90 bottom (schematic designator D1)
D1Q "NUP4114UPXV6T1G" SOTFL50P160X60-6N 34.468,75.12 r90 bottom (schematic designator D1)
D1R "NUP4114UPXV6T1G" SOTFL50P160X60-6N 34.468,61.393 r90 bottom (schematic designator D1)
D1S "NUP4114UPXV6T1G" SOTFL50P160X60-6N 34.468,68.256 r90 bottom (schematic designator D1)
D1T "NUP4114UPXV6T1G" SOTFL50P160X60-6N 39.63,57.622 r90 bottom (schematic designator D1)
D1U "NUP4114UPXV6T1G" SOTFL50P160X60-6N 39.63,50.759 r90 bottom (schematic designator D1)
FTG1 "Use only in PCB" FIDUCIAL_TOP_C100-200 181,90 r90 top
FTG2 "Use only in PCB" FIDUCIAL_TOP_S100-200#1 8.2,-0.9 r90 top
FTG3 "Use only in PCB" FIDUCIAL_TOP_S100-200#2 8.255,-0.8 r90 bottom
FTG4 "Use only in PCB" FIDUCIAL_TOP_C100-200 181,90 r90 bottom
FTG5 "Use only in PCB" FIDUCIAL_TOP_S100-200#3 181.073,-0.8 r90 bottom
FTG6 "Use only in PCB" FIDUCIAL_TOP_S100-200#3 181.073,-0.8 r90 top
IC20A "FIN1101K8X" SOP50P310X90-8N 39.63,30.217 r90 top (schematic designator IC20)
IC20B "FIN1101K8X" SOP50P310X90-8N 34.468,20.21 r90 top (schematic designator IC20)
IC20C "FIN1101K8X" SOP50P310X90-8N 34.468,40.801 r90 top (schematic designator IC20)
IC20D "FIN1101K8X" SOP50P310X90-8N 39.63,23.778 r270 top (schematic designator IC20)
IC20E "FIN1101K8X" SOP50P310X90-8N 39.63,37.081 r90 top (schematic designator IC20)
IC20F "FIN1101K8X" SOP50P310X90-8N 39.63,16.914 r270 top (schematic designator IC20)
IC20G "FIN1101K8X" SOP50P310X90-8N 34.468,33.937 r90 top (schematic designator IC20)
IC20H "FIN1101K8X" SOP50P310X90-8N 34.468,13.771 r270 top (schematic designator IC20)
IC20I "FIN1101K8X" SOP50P310X90-8N 34.468,27.074 r90 top (schematic designator IC20)
IC20J "FIN1101K8X" SOP50P310X90-8N 39.63,10.051 r270 top (schematic designator IC20)
IC20K "FIN1101K8X" SOP50P310X90-8N 39.63,71.4 r90 top (schematic designator IC20)
IC20L "FIN1101K8X" SOP50P310X90-8N 34.468,6.907 r270 top (schematic designator IC20)
IC20M "FIN1101K8X" SOP50P310X90-8N 34.468,81.984 r90 top (schematic designator IC20)
IC20N "FIN1101K8X" SOP50P310X90-8N 34.468,54.529 r90 top (schematic designator IC20)
IC20O "FIN1101K8X" SOP50P310X90-8N 39.637,78.298 r90 top (schematic designator IC20)
IC20P "FIN1101K8X" SOP50P310X90-8N 39.63,64.536 r90 top (schematic designator IC20)
IC20Q "FIN1101K8X" SOP50P310X90-8N 34.468,75.12 r90 top (schematic designator IC20)
IC20R "FIN1101K8X" SOP50P310X90-8N 34.468,61.393 r90 top (schematic designator IC20)
IC20S "FIN1101K8X" SOP50P310X90-8N 34.468,68.256 r90 top (schematic designator IC20)
IC20T "FIN1101K8X" SOP50P310X90-8N 39.63,57.672 r90 top (schematic designator IC20)
IC20U "FIN1101K8X" SOP50P310X90-8N 39.63,50.809 r90 top (schematic designator IC20)
IC27 "TPS62175DQC" SON50P200X300X80-11N-R94X250 111.369,3.569 r180 top
J1 "N10226-5212PC" 3M_N10226-5212PC -2.921,25 r90 top locked
J2 "N10226-5212PC" 3M_N10226-5212PC -2.921,66.9 r90 top locked
L2 "10uH" IND_MURATA-PS_8400 106.886,0.612 r270 top
R1 "10k" RESC1005X40N 108.83,6.111 r90 top
R8 "100" RESC1005X40N 34.265,2.044 r180 top
R9 "100" RESC1005X40N 34.265,3.109 r180 top
R121 "75k" RESC1005X40N 112.398,5.85 r0 top
R122 "24k" RESC1005X40N 110.438,5.85 r0 top
R131A "100" RESC1005X40N 37.872,30.213 r90 top (schematic designator R131)
R131B "100" RESC1005X40N 32.709,20.206 r90 top (schematic designator R131)
R131C "100" RESC1005X40N 32.709,40.797 r90 top (schematic designator R131)
R131D "100" RESC1005X40N 41.389,23.782 r270 top (schematic designator R131)
R131E "100" RESC1005X40N 37.872,37.077 r90 top (schematic designator R131)
R131F "100" RESC1005X40N 41.389,16.918 r270 top (schematic designator R131)
R131G "100" RESC1005X40N 32.709,33.933 r90 top (schematic designator R131)
R131H "100" RESC1005X40N 36.226,13.775 r270 top (schematic designator R131)
R131I "100" RESC1005X40N 32.709,27.07 r90 top (schematic designator R131)
R131J "100" RESC1005X40N 41.389,10.054 r270 top (schematic designator R131)
R131K "100" RESC1005X40N 37.872,71.396 r90 top (schematic designator R131)
R131L "100" RESC1005X40N 36.226,6.911 r270 top (schematic designator R131)
R131M "100" RESC1005X40N 32.709,81.98 r90 top (schematic designator R131)
R131N "100" RESC1005X40N 32.709,54.525 r90 top (schematic designator R131)
R131O "100" RESC1005X40N 37.872,78.26 r90 top (schematic designator R131)
R131P "100" RESC1005X40N 37.872,64.532 r90 top (schematic designator R131)
R131Q "100" RESC1005X40N 32.709,75.116 r90 top (schematic designator R131)
R131R "100" RESC1005X40N 32.709,61.389 r90 top (schematic designator R131)
R131S "100" RESC1005X40N 32.709,68.252 r90 top (schematic designator R131)
R131T "100" RESC1005X40N 37.872,57.668 r90 top (schematic designator R131)
R131U "100" RESC1005X40N 37.872,50.805 r90 top (schematic designator R131)
SCREW1 "3341-31" 3M_3341-31 -17.666,9.433 r180 top
SCREW2 "3341-31" 3M_3341-31 -17.74,40.589 r180 top
SCREW3 "3341-31" 3M_3341-31 -17.74,51.35 r180 top
SCREW4 "3341-31" 3M_3341-31 -17.592,82.752 r180 top
T_B7 "Plated Hole" c600h270 0,0 r0 top
T_B8 "Plated Hole" c600h270 0,88.9 r0 top locked
T_C1 "1uF" CAPC1608X87N 184.83,19.466 r90 top
T_C2 "4.7uF" CAPMP3216X180N 182.667,16.217 r0 top
T_C3 "100nF" CAPC1005X55N 175.39,10.097 r90 top
T_C4 "100nF" CAPC1005X55N 175.39,12.775 r270 top
T_C5 "100nF" CAPC1005X55N 166.881,10.097 r90 top
T_C6 "100nF" CAPC1005X55N 166.881,12.775 r270 top
T_C7 "100nF" CAPC1005X55N 158.372,10.097 r90 top
T_C8 "100nF" CAPC1005X55N 109.007,9.545 r180 top
T_C9 "100nF" CAPC1005X55N 158.372,12.775 r270 top
T_C12 "22pF" CAPC1005X55N 4.7,0 r0 top
T_C13 "10nF" CAPC1005X55N 163.151,2.864 r90 top
T_C14 "100nF" CAPC1005X55N 171.775,2.213 r270 top
T_C15 "100nF" CAPC1005X55N 166.841,2.213 r270 top
T_C16 "10nF" CAPC1005X55N 165.891,2.213 r270 top
T_C17 "10nF" CAPC1005X55N 172.726,-0.364 r90 top
T_C18 "10nF" CAPC1005X55N 165.891,-0.364 r90 top
T_C19 "10nF" CAPC1005X55N 166.841,-0.364 r90 top
T_C20 "100nF" CAPC1005X55N 160.853,0.322 r90 top
T_C21 "100nF" CAPC1005X55N 172.726,2.213 r90 top
T_C22 "100nF" CAPC1005X55N 182.972,3.09 r180 top
T_C23 "100nF" CAPC1005X55N 182.972,1.82 r180 top
T_D1 "UCLAMP3305P.TCT" SON50P160X65_HS-7N 182.5,25.421 r180 top
T_D2 "UCLAMP3305P.TCT" SON50P160X65_HS-7N 188.731,4.933 r90 top
T_D3 "UCLAMP3305P.TCT" SON50P160X65_HS-7N 188.731,8.332 r90 top
T_D4 "UCLAMP3305P.TCT" SON50P160X65_HS-7N 167.499,25.421 r180 top
T_D6 "CDBU0520-HF" SOD-523F 166.358,-1.923 r180 top
T_IC1 "MIC5219-3.3YM5" SOT95P280X145-5N 182.105,19.466 r270 top
T_IC2 "24AA02E48T-I/OT" SOT95P280X145-5N 178.621,10.097 r180 top
T_IC3 "24AA025E48-I/SN" SOIC127P600X175-8N 178.621,10.097 r90 top
T_IC4 "24AA02E48T-I/OT" SOT95P280X145-5N 170.112,10.097 r180 top
T_IC5 "24AA025E48-I/SN" SOIC127P600X175-8N 170.112,10.097 r90 top
T_IC6 "LM75AIMMX/NOPB" DGK0008A_M 111.368,12.054 r180 top
T_IC7 "TPS3808G01DBVT" SOT95P280X145-6N 163.151,-0.578 r90 top
T_IC8 "FXMA2102UMX" FXMA2102UMX 180.631,2.402 r180 top
T_IC9 "24AA02E48T-I/OT" SOT95P280X145-5N 161.603,10.097 r180 top
T_IC10 "24AA025E48-I/SN" SOIC127P600X175-8N 161.603,10.097 r90 top
T_J1 "" 3M_N2530-6002RB 190,38.7 r270 top locked
T_J2 "" 3M_N2530-6002RB 175,38.7 r270 top locked
T_J3 "" 3M_N2530-6002RB 160,38.7 r270 top locked
T_J4 "P1" AMPHENOL_10052825-101LF 207.15,3.95 r90 top locked
T_J5 "P6" AMPHENOL_10052838-101LF 207.15,82.95 r90 top locked
T_LD1 "Red/Green" LED_DIALIGHT_571-0112F -0.9,45.95 r0 top locked
T_LD3 "Green" LED_KINGBRIGHT_KPH-1608CGCK 102.362,0.877 r90 top
T_LD4 "Green" LED_KINGBRIGHT_KPH-1608CGCK 173.858,8.452 r90 top
T_LD5 "Green" LED_KINGBRIGHT_KPH-1608CGCK 165.349,8.452 r90 top
T_LD6 "Green" LED_KINGBRIGHT_KPH-1608CGCK 156.84,8.452 r90 top
T_M1 "PTH_3.4X6_BTKO" PTH-M3.4x6.0_BTKO 97.6,88.9 r180 top locked
T_M2 "PTH_3.4X6_BTKO" PTH-M3.4x6.0_BTKO 187.6,88.9 r180 top
T_M3 "PTH_3.4X6_BTKO" PTH-M3.4x6.0_BTKO 97.6,0 r0 top locked
T_M4 "PTH_3.4X6_BTKO" PTH-M3.4x6.0_BTKO 187.6,0 r0 top locked
T_R1 "1k6" RESC1005X40N 111.418,7.264 r0 top
T_R2 "0" RESC1005X40N 181.429,14.556 r0 top
T_R3 "10k" RESC1005X40N 114.98,6.818 r0 top
T_R4 "0" RESC1005X40N 180.971,22.184 r0 top
T_R5 "1k6" RESC1005X40N 102.362,3.263 r90 top
T_R6 "1k6" RESC1005X40N 173.858,10.834 r90 top
T_R7 "10k" RESC1005X40N 183.025,22.184 r180 top
T_R8 "10k" RESC1005X40N 113.223,9.545 r180 top
T_R9 "1k6" RESC1005X40N 165.349,10.834 r90 top
T_R10 "1k6" RESC1005X40N 156.84,10.834 r90 top
T_R13 "22" RESC1005X40N 185.98,6.807 r0 top
T_R14 "22" RESC1005X40N 185.98,7.861 r0 top
T_R15 "22" RESC1005X40N 185.98,5.752 r0 top
T_R16 "22" RESC1005X40N 185.98,8.915 r0 top
T_R17 "22" RESC1005X40N 185.98,4.698 r0 top
T_R18 "22" RESC1005X40N 185.98,9.969 r0 top
T_R19 "200" RESC1005X40N 178.773,2.402 r270 top
T_R25 "0" RESC1005X40N 111.039,9.546 r180 top
T_R26 "1M1" RESC2012X60N 5.152,88.9 r0 top
T_R27 "10M" RESC2113X55N 67.564,-1.354 r180 top
T_R28 "10M" RESC2113X55N 36.001,-1.354 r180 top
T_R29 "100k" RESC1005X40N 164.214,2.864 r270 top
T_R30 "3k9" RESC1005X40N 162.1,2.864 r270 top
T_R31 "10k" RESC1005X40N 184.07,6.807 r180 top
T_R32 "10k" RESC1005X40N 184.07,7.861 r180 top
T_R33 "10k" RESC1005X40N 184.07,8.915 r180 top
T_R34 "10k" RESC1005X40N 184.07,9.969 r180 top
T_R35 "0" RESC1005X40N 193.138,55.68 r180 bottom
T_R36 "0" RESC1005X40N 193.138,53.14 r180 bottom
T_R37 "0" RESC1005X40N 193.138,48.06 r180 bottom
T_R38 "0" RESC1005X40N 193.138,42.041 r180 bottom
T_R39 "0" RESC1005X40N 193.138,40.44 r180 bottom
T_R40 "0" RESC1005X40N 193.138,37.9 r180 bottom
T_R41 "0" RESC1005X40N 193.138,32.82 r180 bottom
T_R42 "0" RESC1005X40N 193.138,30.28 r180 bottom
T_R43 "0" RESC1005X40N 178.138,55.68 r180 bottom
T_R44 "0" RESC1005X40N 178.138,49.661 r180 bottom
T_R45 "0" RESC1005X40N 178.138,48.06 r180 bottom
T_R46 "0" RESC1005X40N 178.138,42.041 r180 bottom
T_R47 "0" RESC1005X40N 178.138,40.44 r180 bottom
T_R48 "0" RESC1005X40N 178.138,34.441 r180 bottom
T_R49 "0" RESC1005X40N 178.138,32.82 r180 bottom
T_R50 "0" RESC1005X40N 178.138,26.801 r0 bottom
T_R51 "0" RESC1005X40N 193.138,54.741 r180 bottom
T_R52 "0" RESC1005X40N 193.138,52.201 r180 bottom
T_R53 "0" RESC1005X40N 193.138,47.121 r180 bottom
T_R54 "0" RESC1005X40N 193.138,42.98 r180 bottom
T_R55 "0" RESC1005X40N 193.138,39.501 r180 bottom
T_R56 "0" RESC1005X40N 193.138,36.961 r180 bottom
T_R57 "0" RESC1005X40N 193.138,31.881 r180 bottom
T_R58 "0" RESC1005X40N 193.138,29.341 r180 bottom
T_R59 "0" RESC1005X40N 178.138,54.741 r180 bottom
T_R60 "0" RESC1005X40N 178.138,50.6 r180 bottom
T_R61 "0" RESC1005X40N 178.138,47.121 r180 bottom
T_R62 "0" RESC1005X40N 178.138,42.98 r180 bottom
T_R63 "0" RESC1005X40N 178.138,39.501 r180 bottom
T_R64 "0" RESC1005X40N 178.138,35.34 r180 bottom
T_R65 "0" RESC1005X40N 178.138,31.881 r180 bottom
T_R66 "0" RESC1005X40N 178.138,27.74 r0 bottom
T_T1 "BSS138LT1G" SOT95P240X110-3N 106.426,5.407 r180 top
T_T2 "BSS138LT1G" SOT95P240X110-3N 175.182,-0.814 r180 top
T_T3 "BSS138LT1G" SOT95P240X110-3N 169.298,-0.814 r180 top
T_T4 "BSS138LT1G" SOT95P240X110-3N 175.182,2.663 r180 top
T_T5 "BSS138LT1G" SOT95P240X110-3N 169.298,2.663 r180 top
T_TP1 "Test Point" TPS127 115.062,5.227 r180 top
T_TP2 "Test Point" TPS127 102.362,5.227 r180 top
T_TP3 "Test Point" TPS127 173.858,12.797 r180 top
T_TP4 "Test Point" TPS127 165.349,12.797 r180 top
T_TP5 "Test Point" TPS127 156.84,12.797 r180 top
T_TP6 "Test Point" TPS127 102.362,-1.589 r180 top
T_TP7 "Test Point" TPS127 173.858,5.935 r180 top
T_TP8 "Test Point" TPS127 165.349,5.935 r180 top
T_TP9 "Test Point" TPS127 156.84,5.935 r180 top
T_TP10 "Test Point" TPS127 115.062,-1.589 r180 top

## Footprints (in the part's own frame and the unit in brackets; to place one, negate y for a bottom-side part, rotate by r counter-clockwise, add the part's x,y. Pads: shape width x height; smd on the part's side, far side on the other; paste and mask are expansions set on the pad)
3M_3341-31 [mm] "MDR Female Screw Locks : Thread Length= 3.8mm, Thread Size: M2.5"
  silkscreen extent -4.04,-2.74 5.26,2.74, body extent -9.01,-2.74 5.26,2.74, height 2.37
3M_N2530-6002RB [mm] "30 Contacts - Straight .100\" x .100\" Low Profile Four-Wall Header"
  round 1.6 hole 1: 1(-17.78,-1.27) 2(-17.78,1.27) 3(-15.24,-1.27) 4(-15.24,1.27) 5(-12.7,-1.27) 6(-12.7,1.27) 7(-10.16,-1.27) 8(-10.16,1.27) 9(-7.62,-1.27) 10(-7.62,1.27) 11(-5.08,-1.27) 12(-5.08,1.27) 13(-2.54,-1.27) 14(-2.54,1.27) 15(0,-1.27) 16(0,1.27) 17(2.54,-1.27) 18(2.54,1.27) 19(5.08,-1.27) 20(5.08,1.27) 21(7.62,-1.27) 22(7.62,1.27) 23(10.16,-1.27) 24(10.16,1.27) 25(12.7,-1.27) 26(12.7,1.27) 27(15.24,-1.27) 28(15.24,1.27) 29(17.78,-1.27) 30(17.78,1.27)
  silkscreen extent -22.71,-4.85 22.71,4.52, body extent -22.71,-4.11 22.71,4.52, height 9.91
3M_N10226-5212PC [mm] "26 contacts, Mini D Ribbon (MDR), 102 Series, .050\" Boardmount Through-hole Right Angle Receptacle-Shielded"
  round 1.4 hole 0.8: 1(-7.62,-4.826) 2(-6.35,-2.921) 3(-5.08,-4.826) 4(-3.81,-2.921) 5(-2.54,-4.826) 6(-1.27,-2.921) 7(0,-4.826) 8(1.27,-2.921) 9(2.54,-4.826) 10(3.81,-2.921) 11(5.08,-4.826) 12(6.35,-2.921) 13(7.62,-4.826) 14(-7.62,-1.016) 15(-6.35,0.889) 16(-5.08,-1.016) 17(-3.81,0.889) 18(-2.54,-1.016) 19(-1.27,0.889) 20(0,-1.016) 21(1.27,0.889) 22(2.54,-1.016) 23(3.81,0.889) 24(5.08,-1.016) 25(6.35,0.889) 26(7.62,-1.016)
  round 5.5 hole 2.8: 27(-15.621,-2.921) 28(15.621,-2.921)
  silkscreen extent -18.54,-6.5 18.54,11.05, body extent -18.54,-5.71 18.54,11.05, height 9.4
AMPHENOL_10052825-101LF [mm] "72 Contacts, 2mm Pitch, 6 Columns, 4 Pairs per Column, 4 Walls, Right Angle Header"
  round 1.1 hole 0.5: A1(-5,-7.65) A2(-3,-7.75) A3(-1,-7.65) A4(1,-7.75) A5(3,-7.65) A6(5,-7.75) B1(-5,-6.25) B2(-3,-6.35) B3(-1,-6.25) B4(1,-6.35) B5(3,-6.25) B6(5,-6.35) C1(-5,-4.85) C2(-3,-4.95) C3(-1,-4.85) C4(1,-4.95) C5(3,-4.85) C6(5,-4.95) D1(-5,-3.45) D2(-3,-3.55) D3(-1,-3.45) D4(1,-3.55) D5(3,-3.45) D6(5,-3.55) E1(-5,-2.05) E2(-3,-2.15) E3(-1,-2.05) E4(1,-2.15) E5(3,-2.05) E6(5,-2.15) F1(-5,-0.65) F2(-3,-0.75) F3(-1,-0.65) F4(1,-0.75) F5(3,-0.65) F6(5,-0.75) G1(-5,0.75) G2(-3,0.65) G3(-1,0.75) G4(1,0.65) G5(3,0.75) G6(5,0.65) H1(-5,2.15) H2(-3,2.05) H3(-1,2.15) H4(1,2.05) H5(3,2.15) H6(5,2.05) I1(-5,3.55) I2(-3,3.45) I3(-1,3.55) I4(1,3.45) I5(3,3.55) I6(5,3.45) J1(-5,4.95) J2(-3,4.85) J3(-1,4.95) J4(1,4.85) J5(3,4.95) J6(5,4.85) K1(-5,6.35) K2(-3,6.25) K3(-1,6.35) K4(1,6.25) K5(3,6.35) K6(5,6.25) L1(-5,7.75) L2(-3,7.65) L3(-1,7.75) L4(1,7.65) L5(3,7.75) L6(5,7.65)
  silkscreen extent -6.95,-21.95 6.95,11.85, body extent -6.95,-21.95 6.95,11.85, height 15.25
AMPHENOL_10052838-101LF [mm] "96 Contacts, 2mm Pitch, 8 Columns, 4 Pairs per Column, 4 Walls, Right Angle Header"
  round 1.1 hole 0.5: A1(-7,-7.65) A2(-5,-7.75) A3(-3,-7.65) A4(-1,-7.75) A5(1,-7.65) A6(3,-7.75) A7(5,-7.65) A8(7,-7.75) B1(-7,-6.25) B2(-5,-6.35) B3(-3,-6.25) B4(-1,-6.35) B5(1,-6.25) B6(3,-6.35) B7(5,-6.25) B8(7,-6.35) C1(-7,-4.85) C2(-5,-4.95) C3(-3,-4.85) C4(-1,-4.95) C5(1,-4.85) C6(3,-4.95) C7(5,-4.85) C8(7,-4.95) D1(-7,-3.45) D2(-5,-3.55) D3(-3,-3.45) D4(-1,-3.55) D5(1,-3.45) D6(3,-3.55) D7(5,-3.45) D8(7,-3.55) E1(-7,-2.05) E2(-5,-2.15) E3(-3,-2.05) E4(-1,-2.15) E5(1,-2.05) E6(3,-2.15) E7(5,-2.05) E8(7,-2.15) F1(-7,-0.65) F2(-5,-0.75) F3(-3,-0.65) F4(-1,-0.75) F5(1,-0.65) F6(3,-0.75) F7(5,-0.65) F8(7,-0.75) G1(-7,0.75) G2(-5,0.65) G3(-3,0.75) G4(-1,0.65) G5(1,0.75) G6(3,0.65) G7(5,0.75) G8(7,0.65) H1(-7,2.15) H2(-5,2.05) H3(-3,2.15) H4(-1,2.05) H5(1,2.15) H6(3,2.05) H7(5,2.15) H8(7,2.05) I1(-7,3.55) I2(-5,3.45) I3(-3,3.55) I4(-1,3.45) I5(1,3.55) I6(3,3.45) I7(5,3.55) I8(7,3.45) J1(-7,4.95) J2(-5,4.85) J3(-3,4.95) J4(-1,4.85) J5(1,4.95) J6(3,4.85) J7(5,4.95) J8(7,4.85) K1(-7,6.35) K2(-5,6.25) K3(-3,6.35) K4(-1,6.25) K5(1,6.35) K6(3,6.25) K7(5,6.35) K8(7,6.25) L1(-7,7.75) L2(-5,7.65) L3(-3,7.75) L4(-1,7.65) L5(1,7.75) L6(3,7.65) L7(5,7.75) L8(7,7.65)
  silkscreen extent -8.95,-21.95 8.95,11.85, body extent -8.95,-21.95 8.95,11.85, height 15.25
c600h270 [mm] "Plated Through Hole: Hole Dia.=2.7mm Pad Dia.=6.0mm"
  round 6 hole 2.7: 1(0,0)
CAPAE430X540N [mm] "Capacitor, Aluminium Electrolytric, 4.3mm L X 4.3mm W X 5.4mm H, IPC Medium Density"
  rect 2.55x1.6 smd: 1(-1.75,0) 2(1.75,0)
  silkscreen extent -2.8,-2.15 2.15,2.15, body extent -2.75,-2.25 2.75,2.25, height 5.7
CAPC1005X55N [mm] "Chip Capacitor, Body 1.0x0.55mm, IPC Medium Density"
  rect 0.62x0.62 smd: 1(-0.45,0) 2(0.45,0)
  body extent -0.52,-0.27 0.53,0.28, height 0.55
CAPC1608X87N [mm] "Chip Capacitor, Body 1.6x0.8mm IPC Medium Density"
  rect 0.95x1 smd: 1(-0.8,0) 2(0.8,0)
  body extent -0.87,-0.47 0.88,0.48, height 0.87
CAPC2012X135N [mm] "Chip Capacitor, Body 2.0x1.25mm, IPC Medium Density"
  rect 1.05x1.4 smd: 1(-0.9,0) 2(0.9,0)
  silkscreen extent 0,-0.58 0,0.58, body extent -1.05,-0.67 1.05,0.68, height 1.25
CAPMP3216X180N [mm] "Capacitor, Polarized, Molded  Body 3.2x1.6mm, IPC Medium Density"
  rect 1.8x1.25 smd: 1(-1.3,0) 2(1.3,0)
  silkscreen extent -2.57,-1.27 0,0.7, body extent -1.7,-0.9 1.7,0.9, height 1.6
DGK0008A_M [mm] "TSOP, 8-Leads, Body 3.1x3.1mm, Pitch 0.65mm, IPC Low Density"
  rrect22% 1.55x0.45 smd: 1(-2.325,0.975) 2(-2.325,0.325) 3(-2.325,-0.325) 4(-2.325,-0.975) 5(2.325,-0.975) 6(2.325,-0.325) 7(2.325,0.325) 8(2.325,0.975)
  silkscreen extent -2.45,-1.55 1.15,1.92, body extent -2.45,-1.5 2.45,1.5, height 0.94
FIDUCIAL_TOP_C100-200 [mm] "Round Fiducial Target, Top Layer, 1.0mm, Top Solder 2.0mm, Keepout =2.0mm"
  round 1 smd paste-0.51 mask+0.5: FTG2(0,0)
  L1 keep-out circle w0.1: c0,0 r1
FIDUCIAL_TOP_S100-200#1 [mm] "Square Fiducial Target, Top Layer, 1.0mm, Top Solder 2.0mm, Keepout =2.0mm"
  rect 1x1 smd rot 45 paste-0.51 mask+0.5: 1(0.1,0)
  L1 keep-out region: 1.414,0 0,-1.414 -1.414,0 0,1.414
FIDUCIAL_TOP_S100-200#2 [mm] "Square Fiducial Target, Top Layer, 1.0mm, Top Solder 2.0mm, Keepout =2.0mm"
  rect 1x1 smd rot 45 paste-0.51 mask+0.5: 1(-0.05,-0.055)
  L1 keep-out region: 1.414,0 0,-1.414 -1.414,0 0,1.414
FIDUCIAL_TOP_S100-200#3 [mm] "Square Fiducial Target, Top Layer, 1.0mm, Top Solder 2.0mm, Keepout =2.0mm"
  rect 1x1 smd rot 45 paste-0.51 mask+0.5: 1(0,0)
  L1 keep-out region: 1.414,0 0,-1.414 -1.414,0 0,1.414
FXMA2102UMX [mm]
  rect 0.55x0.25 smd: 1(-0.53,0)
  rect 0.25x0.45 smd: 2(-0.4,-0.475) 3(0,-0.475) 4(0.4,-0.475) 6(0.4,0.475) 7(0,0.475) 8(-0.4,0.475)
  rect 0.45x0.25 smd: 5(0.58,0)
  silkscreen extent -1.1,-0.05 -1,0.05, body extent -0.71,-0.61 0.71,0.61, height 0.5
IND_MURATA-PS_8400 [mm] "Miniature Surface Mount Power Inductors, 4.5mm L X 3.3mm W X 2.9mm H, MURATA 8400 Series"
  rect 2x3.5 smd: 1(-1.6,0) 2(1.6,0)
  silkscreen extent -0.3,-1.8 0.3,1.8, body extent -2.4,-1.8 2.4,1.8, height 2.9
LED_DIALIGHT_571-0112F [mm] "2x 2mm LED (Top: Red, Bot: Green) PCB Edge Mounting (Without positioning pins) DIALIGHT 571 Serie"
  round 1.7 hole 1: 1(0,0) 2(2.54,0) 3(5.08,0) 4(7.62,0)
  silkscreen extent -6.55,-1.24 8.89,1.24, body extent -6.55,-1.24 8.89,1.24, height 8.61
LED_KINGBRIGHT_KPH-1608CGCK [mm] "SMT Green LED, Case 0603, Body L 1.6 x W 0.8mm H 0.65mm"
  rect 0.8x0.8 smd: 1(-0.825,0) 2(0.825,0)
  silkscreen extent -0.98,-1 0.08,0.4, body extent -0.8,-0.4 0.8,0.4, height 0.65
PTH-M3.4x6.0_BTKO [mm]
  round 6 hole 3.4: 1(0,0)
  L4 keep-out region: -5,-3.05 -5,7.3 5,7.3 5,-3.05 1.173,-3.05 1.173,-3.056 2.504,-2.108 3.211,-0.635 3.118,0.997 2.247,2.38 0.817,3.169 -0.817,3.169 -2.247,2.38 -3.118,0.997 -3.211,-0.635 -2.504,-2.108 -1.173,-3.056 -1.173,-3.056 -1.173,-3.05
RESC1005X40N [mm] "Chip Resistor, EIA 0402, Metric 1005, Body 1.0x0.5mm, IPC Medium Density"
  rect 0.58x0.62 smd: 1(-0.47,0) 2(0.47,0)
  body extent -0.52,-0.27 0.53,0.28, height 0.4
RESC2012X60N [mm] "Chip Resistor, EIA 0805, Metric 2012, Body 2.0x1.2mm, IPC Medium Density"
  rect 0.95x1.4 smd: 1(-1,0) 2(1,0)
  silkscreen extent 0,-0.55 0,0.55, body extent -1.1,-0.67 1.1,0.68, height 0.6
RESC2113X55N [mm] "Chip Resistor, EIA 0805, Metric 2113, Body 2.05x1.3mm, IPC Medium Density"
  rect 1x1.45 smd: 1(-0.95,0) 2(0.95,0)
  silkscreen extent 0,-0.55 0,0.55, body extent -1,-0.62 1,0.63, height 0.55
SOD-523F [mm] "Small Outline Diode Flat Lead (SOD-523F), Body; 1.80mm L X 1mm W X 0.85mm H"
  rect 0.6x0.8 smd: 1(-0.85,0) 2(0.85,0)
  silkscreen extent -1.75,-0.5 0.2,0.9, body extent -0.91,-0.5 0.89,0.5, height 0.85
SOIC127P600X175-8N [mm] "SOIC 8, Pitch 1.27mm - Body 4x5mm, IPC Medium Density"
  rect 1.55x0.6 smd: 1(-2.7,1.905) 2(-2.7,0.635) 3(-2.7,-0.635) 4(-2.7,-1.905) 5(2.7,-1.905) 6(2.7,-0.635) 7(2.7,0.635) 8(2.7,1.905)
  silkscreen extent -2.52,-2.5 1.55,2.88, body extent -3.1,-2.5 3.1,2.5, height 1.75
SON50P160X65_HS-7N [mm] "SON, 6-Leads, Body 1,60x1,60mm, Pitch 0,50mm, Thermal Pad 1,18x0,28mm, IPC Medium Density"
  rect 0.63x0.3 smd: 1(-0.76,0.5) 2(-0.76,0) 3(-0.76,-0.5) 4(0.76,-0.5) 5(0.76,0) 6(0.76,0.5)
  rect 0.45x1.3 smd: 7(0,0)
  silkscreen extent -1.28,-0.98 0.85,1.02, body extent -0.85,-0.85 0.85,0.85, height 0.65
SON50P200X300X80-11N-R94X250 [mm] "SON, 10-Leads, Body 2x3mm, Pitch 0.5mm, Thermal Pad 0.94x2.5mm, IPC Medium Density"
  rect 0.7x0.3 smd: 1(-1.05,1) 2(-1.05,0.5) 3(-1.05,0) 4(-1.05,-0.5) 5(-1.05,-1) 6(1.05,-1) 7(1.05,-0.5) 8(1.05,0) 9(1.05,0.5) 10(1.05,1)
  rect 0.94x2.5 smd: 11(0,0)
  silkscreen extent -1.5,-1.55 1.05,1.6, body extent -1.05,-1.55 1.05,1.55, height 0.8
SOP50P310X90-8N [mm] "SOP, 0.50mm pitch; 8 pin, 2.30mm W X 2.00mm L X 0.90mm H body, PC Medium Density"
  rect 0.85x0.3 smd: 1(-1.55,0.75) 2(-1.55,0.25) 3(-1.55,-0.25) 4(-1.55,-0.75) 5(1.55,-0.75) 6(1.55,-0.25) 7(1.55,0.25) 8(1.55,0.75)
  silkscreen extent -1.82,-1 0.8,1.52, body extent -1.62,-1 1.62,1, height 0.9
SOT95P240X110-3N [mm] "SOT23 3-Leads, Pitch 0.95mm, Body 1.3x2.9mm, IPC Medium Density"
  rect 1.05x0.65 smd: 1(-1.15,0.95) 2(-1.15,-0.95) 3(1.15,0)
  silkscreen extent -1.53,-1.45 0.3,1.92, body extent -1.25,-1.5 1.25,1.5, height 1.1
SOT95P280X145-5N [mm] "SOT, 0.95mm pitch; 5 pin, 1.60mm W X 2.90mm L X 1.45mm H body, IPC Medium Density"
  rect 1.1x0.6 smd: 1(-1.3,0.95) 2(-1.3,0) 3(-1.3,-0.95) 4(1.3,-0.95) 5(1.3,0.95)
  silkscreen extent -1.72,-1.45 0.43,1.88, body extent -1.4,-1.5 1.4,1.5, height 1.45
SOT95P280X145-6N [mm] "SOT23, 6-Leads, Body 1.6x3.0mm, Pitch 0.95mm, IPC Medium Density"
  rect 1.05x0.6 smd: 1(-1.35,0.95) 2(-1.35,0) 3(-1.35,-0.95) 4(1.35,-0.95) 5(1.35,0) 6(1.35,0.95)
  silkscreen extent -1.77,-1.55 0.45,1.92, body extent -1.4,-1.5 1.4,1.5, height 1.45
SOTFL50P160X60-6N [mm] "SOTFL (SOT666), 0.50mm, Pitch; 6 Pin, 1.20mm W X 1.60mm L X 0.60mm H Body, IPC Medium Density"
  rect 0.57x0.3 smd: 1(-0.79,0.5) 2(-0.79,0) 3(-0.79,-0.5) 4(0.79,-0.5) 5(0.79,0) 6(0.79,0.5)
  silkscreen extent -1.22,-0.8 0,1.28, body extent -0.85,-0.85 0.85,0.85, height 0.6
TPS127 [mm] "1.27 x  1.27mm SMD Test Point Area"
  rect 1.27x1.27 smd paste-1.27: 1(0,0)
  silkscreen extent -0.94,-0.94 0.94,0.94